# Altium PCB AutonomousVehicle_PowerBoard.PcbDoc
Units mil, origin at the board's own origin, x right, y up, seen from the top; angles counter-clockwise.
Board outline 2030 x 2125 mil, 2 copper layers (Top Layer, Bottom Layer); 39 components, 11 nets, 82 pads, 94 vias.
Unrouted connection lines stored in the file: 8.
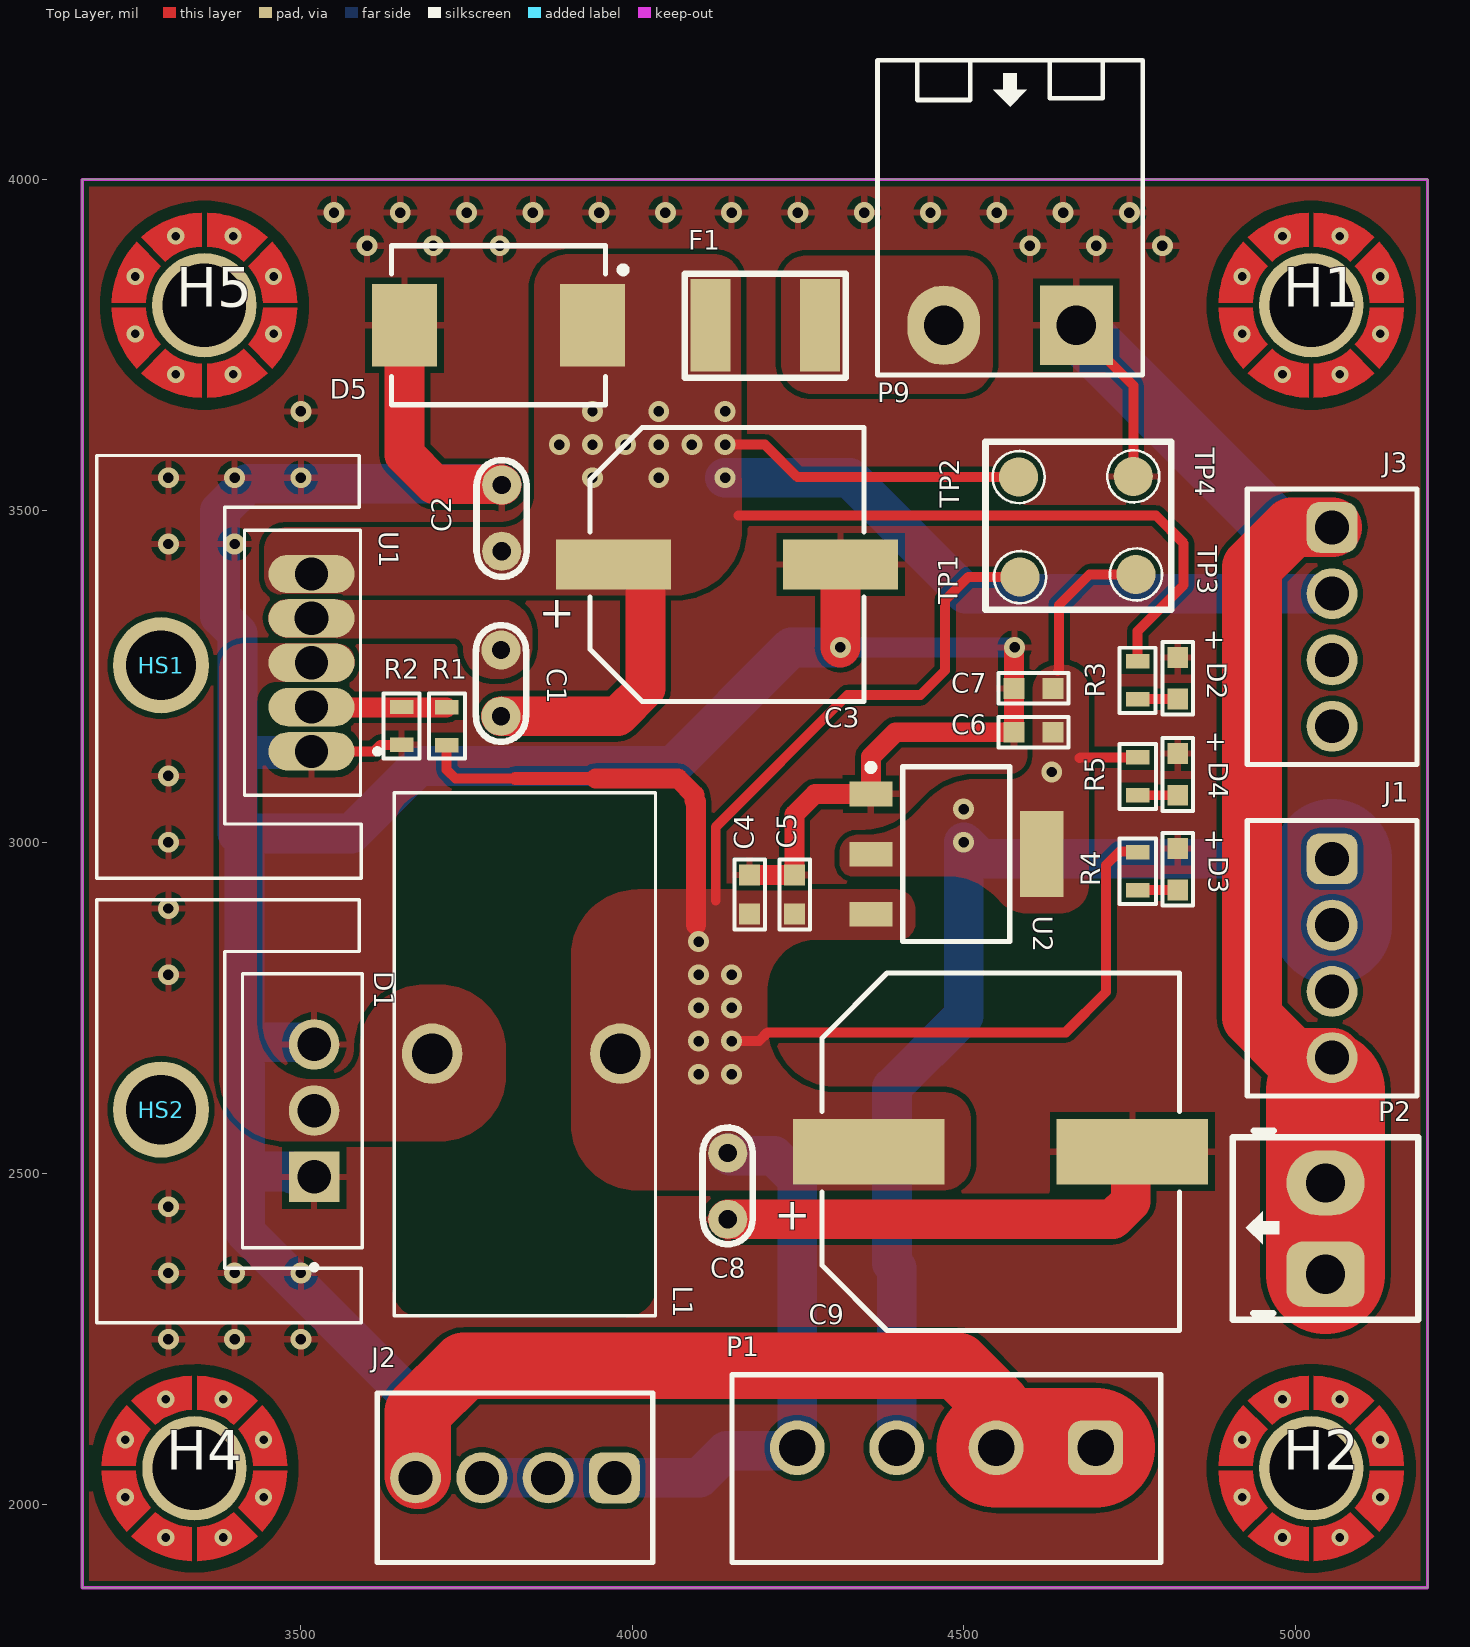
[diagram p0: Top Layer view]
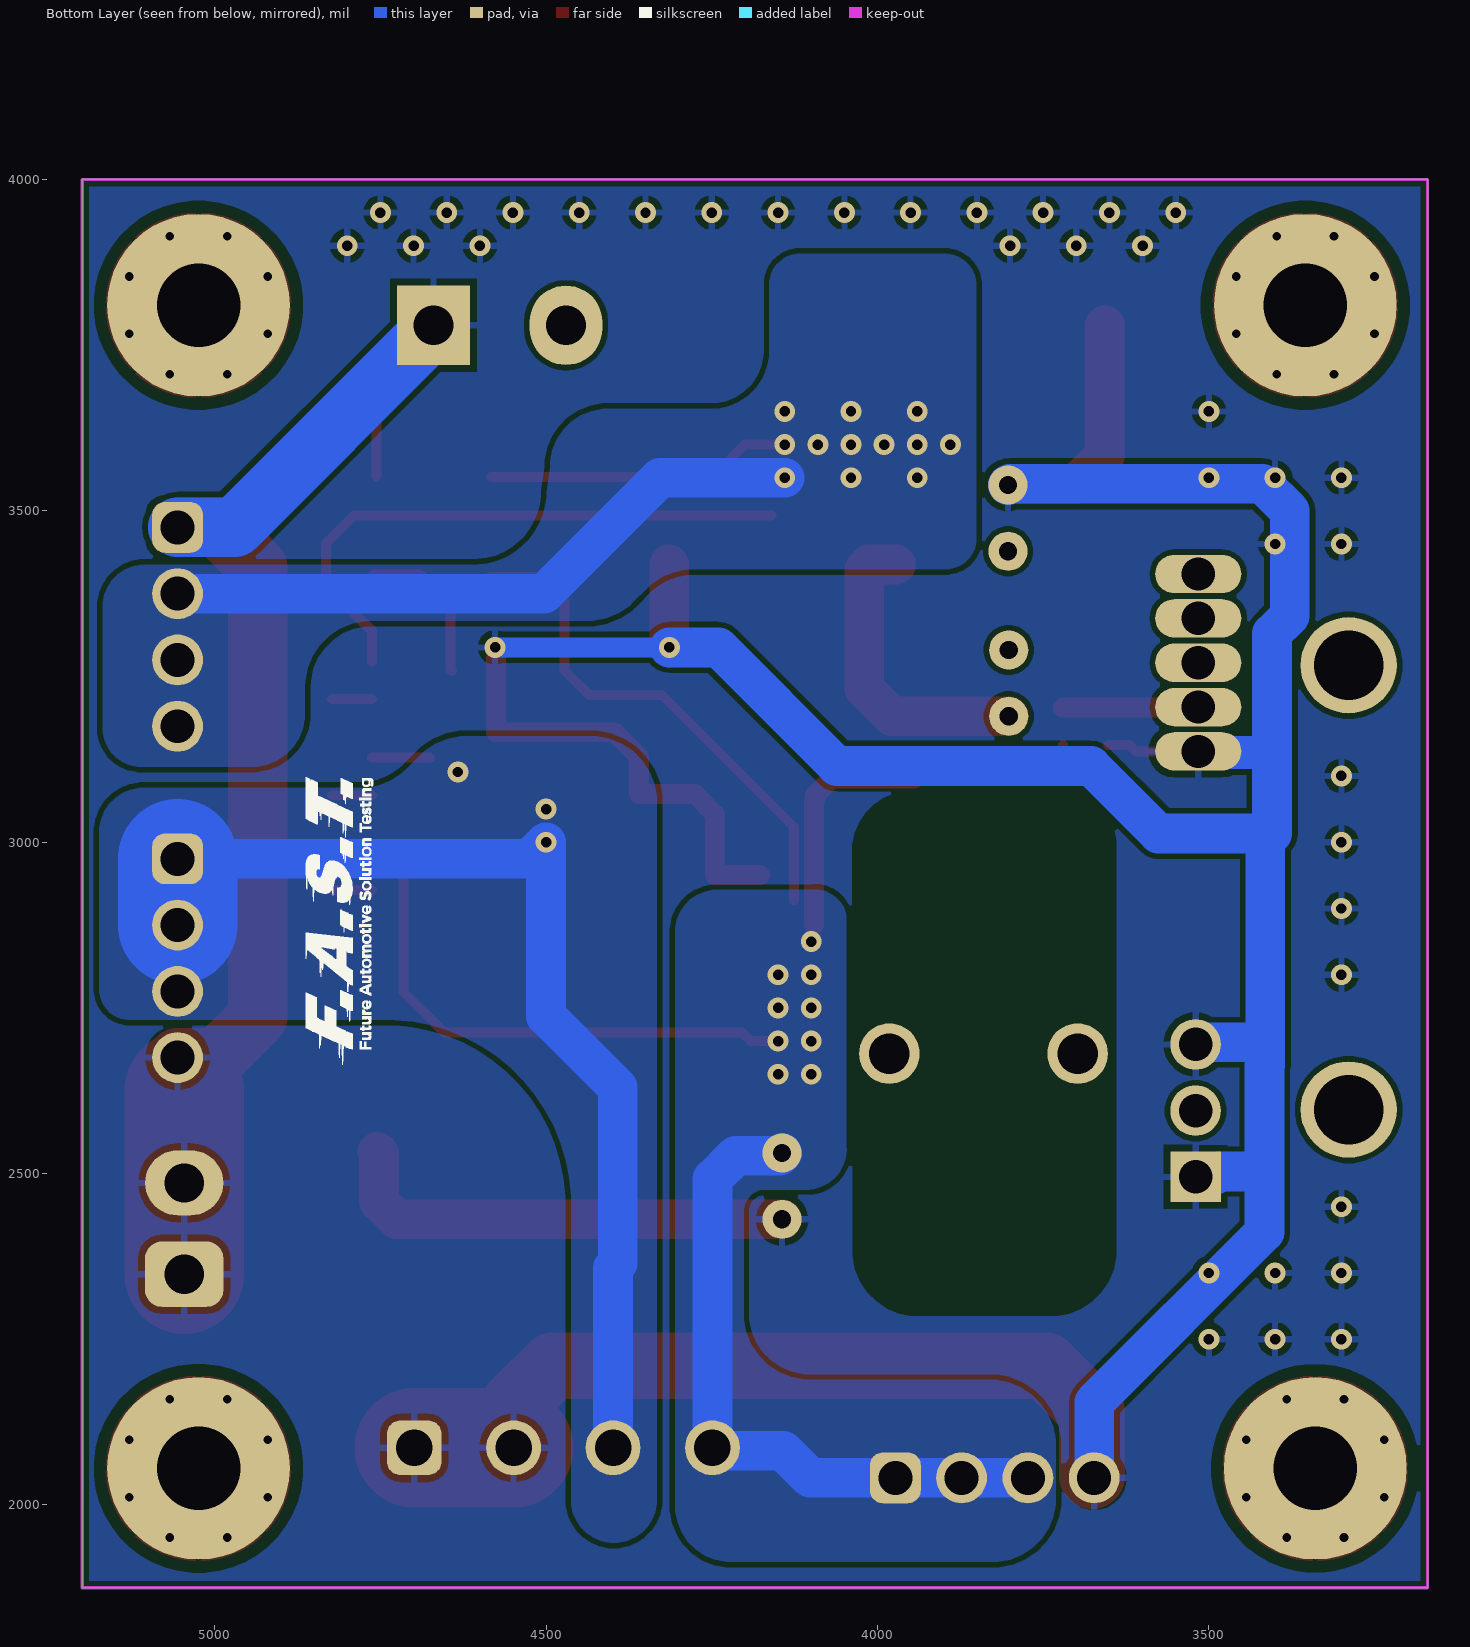
[diagram p1: Bottom Layer view, seen from below]

## Layer stack, top to bottom
Top Solder: solder mask 0.4, Solder Resist, Dk 3.5
Top Layer: signal copper 1.4
Dielectric 1: dielectric 12.6, FR-4, Dk 4.8
Bottom Layer: signal copper 1.4
Bottom Solder: solder mask 0.4, Solder Resist, Dk 3.5

## Board outline
3170,1875 3170,4000 5200,4000 5200,1875

## Design rules (kind name [scope] priority, off if disabled: settings)
Clearance [All] p1: gap=8 ignorepadtopadclearanceinfootprint=FALSE
ComponentClearance [All] p1: gap=5 collisioncheckmode=3 verticalgap=10 showdistances=FALSE
PlaneConnect [All] p1: planeconnectstyle=Direct reliefexpansion=20 reliefentries=4 reliefconductorwidth=10 reliefairgap=10
PolygonConnect PolygonConnect_4 [All vs IsNamedPolygon('GND')] p1: connectstyle=Relief reliefconductorwidth=10 reliefentries=4 polygonreliefangle="90 Angle" airgapwidth=10
PolygonConnect PolygonConnect_3 [All vs IsNamedPolygon('GND')] p2: connectstyle=Direct reliefconductorwidth=10 reliefentries=4 polygonreliefangle="90 Angle" airgapwidth=10
PolygonConnect PolygonConnect_2 [All vs IsNamedPolygon('GND')] p3: connectstyle=Relief reliefconductorwidth=10 reliefentries=4 polygonreliefangle="90 Angle" airgapwidth=10
PolygonConnect PolygonConnect_1 [All vs IsNamedPolygon('GND')] p4: connectstyle=Relief reliefconductorwidth=10 reliefentries=4 polygonreliefangle="90 Angle" airgapwidth=10
PolygonConnect [All] p5: connectstyle=Direct reliefconductorwidth=10 reliefentries=4 polygonreliefangle="90 Angle" airgapwidth=10
RoutingVias [All] p1: holewidth=15.75 width=31.5 viastyle="Through Hole" minholewidth=15.75 minwidth=31.5 maxholewidth=15.75 maxwidth=31.5
SolderMaskExpansion [All] p1: expansion=4 istentingtop=FALSE
Width [All] p1: maxlimit=180 minlimit=15 preferedwidth=60 minimp=50.000000 maximp=50.000000 favimp=50.000000
28 further rules are at their usual default settings.

## Components (designator, comment, footprint, x,y, rotation, side; value= is the part's Value field where it differs from the comment)
C1 "1 uF, 50VDC" CAP_RADIAL_2.54 3802,3191 r90 top
C2 "1 uF, 50VDC" CAP_RADIAL_2.54 3803,3440 r90 top
C3 "470uF, 25V" WCAP-ASLI_D10H10.5 4143,3419 r180 top
C4 "10 uF, 10 VDC" CAP_0603 4180,2922.98 r90 top
C5 "1 uF, 16 VDC" CAP_0603 4242,2918.98 r270 top
C6 "1 uF, 16 VDC" CAP_0603 4603.35,3169 r180 top
C7 "10 uF, 10 VDC" CAP_0603 4607.35,3229 r0 top
C8 "1 uF, 50VDC" CAP_RADIAL_2.54 4144,2530 r270 top
C9 "1000uF, 25V" WCAP-ASLI_D12.5H14 4555.82,2533 r180 top
D1 "Diode_Schottky" TO-220AB 3522.17,2595 r90 top
D2 "Blue, 3.2V" WL-SMCW_0603_H=0.7mm 4823,3247.39 r270 top
D3 "Blue, 3.2V" WL-SMCW_0603_H=0.7mm 4823,2959.22 r270 top
D4 "Blue, 3.2V" WL-SMCW_0603_H=0.7mm 4823,3102.41 r270 top
D5 "5A 40V" "DO-214AB, SMC" 3800.08,3805.24 r0 top
F1 "16V, 2.5A" Fuse_SMD_1812 4200,3780 r180 top
H1 "Hole" Hole_3.2mm 5025,3810 r0 top
H2 "Hole" Hole_3.2mm 5025,2055 r0 top
H4 "Hole" Hole_3.2mm 3340,2055 r0 top
H5 "Hole" Hole_3.2mm 3355,3810 r0 top
HS1 "HeatSink_1Hole" HEATSINK_TO220_SMALL 3342,3335.5 r270 top
HS2 "HeatSink_1Hole" HEATSINK_TO220_SMALL 3342,2665 r270 top
J1 "6A, 150V" 691210910004 5056,2825 r270 top
J2 "6A, 150V" 691210910004 3823,2041 r180 top
J3 "6A, 150V" 691210910004 5056,3325 r270 top
L1 "Toroidal Inductor" "Toroidal Inductor" 3966,2920.68 r0 top
P1 "10A, 300V" 691321300004 4474,2054.78 r180 top
P2 "HDR_Terminal" HDR_Terminal_3.5mm 5057.65,2401.87 r270 top
P9 "HDR_Terminal" KF-5.08-2-R 4670.11,3778.35 r180 top
R1 "10 KOhm, 1/4 W" resistor_0603 3720,3175 r270 top
R2 "3.3 KOhm, 1/4 W" resistor_0603 3652,3175.54 r90 top
R3 "10 KOhm, 1/4 W" resistor_0603 4762.44,3244.44 r90 top
R4 "10 KOhm, 1/4 W" resistor_0603 4763,2956.27 r90 top
R5 "10 KOhm, 1/4 W" resistor_0603 4763,3099.46 r90 top
TP1 "Test_Point" TP_1_5mm_SMD 4586,3398 r0 top
TP2 "Test_Point" TP_1_5mm_SMD 4584,3549 r0 top
TP3 "Test_Point" TP_1_5mm_SMD 4761,3402 r0 top
TP4 "Test_Point" TP_1_5mm_SMD 4757,3550 r0 top
U1 "XL4016" XL4016_TO-220-5 3521,3270.86 r90 top
U2 "AMS1117" AMS1117 4620.43,2986.37 r0 top

## Footprints (in the part's own frame and the unit in brackets; to place one, negate y for a bottom-side part, rotate by r counter-clockwise, add the part's x,y. Pads: shape width x height; smd on the part's side, far side on the other; paste and mask are expansions set on the pad)
691210910004 [mm] "2,54mm - modular - green - Horizontal wire entry - Cage clamp - 0,8mm2 wires - 04p"
  rrect50% 1.95x1.95 hole 1.3: 1(-3.81,0)
  round 1.95 hole 1.3: 2(-1.27,0) 3(1.27,0) 4(3.81,0)
  silkscreen extent -5.28,-3.25 5.28,3.25, body extent -5.28,-3.25 5.28,3.25, height 8.55
691321300004 [mm] "Vertical PCB Header, pitch 3.81mm, 04p"
  rrect50% 2.1x2.1 hole 1.4: 1(-5.715,-0.8)
  round 2.1 hole 1.4: 2(-1.905,-0.8) 3(1.905,-0.8) 4(5.715,-0.8)
  silkscreen extent -8.21,-3.6 8.22,3.6, body extent -8.21,-3.6 8.21,3.6, height 9.25
AMS1117 [mm]
  rect 1.65x0.95 smd: 1(-6.615,2.189) 2(-6.615,-0.111) 3(-6.615,-2.411)
  rect 1.65x3.3 smd: 4(-0.065,-0.111)
  silkscreen extent -6.74,-3.46 -1.29,3.34, body extent -6.84,-3.36 0.16,3.14, height 1.64
CAP_0603 [mm]
  rect 0.8x0.8 smd: 1(-0.801,0.076) 2(0.699,0.076)
  silkscreen extent -1.4,-0.51 1.3,0.66, body extent -0.85,-0.32 0.75,0.48, height 0.8
CAP_RADIAL_2.54 [mm]
  round 1.5 hole 0.7: 1(-0.025,0) 2(2.515,0)
  silkscreen extent -1,-0.97 3.47,0.97, body extent -1.67,-0.85 4.17,0.85, height 6.12
"DO-214AB, SMC" [mm]
  rect 2.5x3.15 smd: 1(-3.646,-0.641) 2(3.554,-0.641)
  silkscreen extent -4.15,-3.69 4.85,2.41, body extent -4.02,-3.62 3.93,2.28, height 2.27
Fuse_SMD_1812 [mil] "Fuse SMD, size 1812"
  rect 60x140 smd: 0(-83.41,0) 1(82,0)
  silkscreen extent -122,-78 121,79, body extent -93,-67 93,67, height 18
HDR_Terminal_3.5mm [mm]
  rrect50% 2.5x3 hole 1.5: 1(1.363,-0.296)
  oval 2.5x3 hole 1.5: 2(-2.137,-0.296)
  silkscreen extent -4.14,-3.85 3.11,3.26, body extent -3.94,-3.94 3.17,3.35, height 8.51
HEATSINK_TO220_SMALL [mil]
  round 145.12 hole 105.12: 1(68.5,-53)
  silkscreen extent -248,-150 390,249
Hole_3.2mm [mm]
  round 4 / inner round 7 / far side round 7 hole 3.2: 1(-0.014,0.006)
  Top Layer pour cut-out: -4.014,0.006 -3.71,1.537 -2.842,2.834 -1.545,3.701 -0.014,4.006 -0.014,4.006 1.517,3.701 2.814,2.834 3.681,1.537 3.986,0.006 3.986,0.006 3.682,-1.525 2.814,-2.822 1.517,-3.69 -0.014,-3.994 -0.014,-3.994 -1.545,-3.69 -2.842,-2.822 -3.71,-1.525 -4.014,0.006
  Top Layer region: -2.264,0.106 -2.239,0.331 -2.189,0.581 -2.114,0.806 -2.039,0.981 -1.964,1.131 -1.889,1.256 -1.789,1.381 -1.689,1.506 -2.614,2.431 -2.789,2.231 -2.939,2.031 -3.064,1.831 -3.189,1.606 -3.289,1.381 -3.364,1.181 -3.439,0.956 -3.489,0.731 -3.514,0.606 -3.539,0.456 -3.564,0.106
  Top Layer region: -2.264,-0.094 -2.239,-0.319 -2.189,-0.569 -2.114,-0.794 -2.039,-0.969 -1.964,-1.119 -1.889,-1.244 -1.789,-1.369 -1.689,-1.494 -2.614,-2.419 -2.789,-2.219 -2.939,-2.019 -3.064,-1.819 -3.189,-1.594 -3.289,-1.369 -3.364,-1.169 -3.439,-0.944 -3.489,-0.719 -3.514,-0.594 -3.539,-0.444 -3.564,-0.094
  Top Layer region: -0.114,2.256 -0.339,2.231 -0.589,2.181 -0.814,2.106 -0.989,2.031 -1.139,1.956 -1.264,1.881 -1.389,1.781 -1.514,1.681 -2.439,2.606 -2.239,2.781 -2.039,2.931 -1.839,3.056 -1.614,3.181 -1.389,3.281 -1.189,3.356 -0.964,3.431 -0.739,3.481 -0.614,3.506 -0.464,3.531 -0.114,3.556
  Top Layer region: 0.086,2.256 0.311,2.231 0.561,2.181 0.786,2.106 0.961,2.031 1.111,1.956 1.236,1.881 1.361,1.781 1.486,1.681 2.411,2.606 2.211,2.781 2.011,2.931 1.811,3.056 1.586,3.181 1.361,3.281 1.161,3.356 0.936,3.431 0.711,3.481 0.586,3.506 0.436,3.531 0.086,3.556
  Top Layer region: 2.236,-0.094 2.211,-0.319 2.161,-0.569 2.086,-0.794 2.011,-0.969 1.936,-1.119 1.861,-1.244 1.761,-1.369 1.661,-1.494 2.586,-2.419 2.761,-2.219 2.911,-2.019 3.036,-1.819 3.161,-1.594 3.261,-1.369 3.336,-1.169 3.411,-0.944 3.461,-0.719 3.486,-0.594 3.511,-0.444 3.536,-0.094
  Top Layer region: 2.236,0.106 2.211,0.331 2.161,0.581 2.086,0.806 2.011,0.981 1.936,1.131 1.861,1.256 1.761,1.381 1.661,1.506 2.586,2.431 2.761,2.231 2.911,2.031 3.036,1.831 3.161,1.606 3.261,1.381 3.336,1.181 3.411,0.956 3.461,0.731 3.486,0.606 3.511,0.456 3.536,0.106
  Top Layer region: 0.086,-2.244 0.311,-2.219 0.561,-2.169 0.786,-2.094 0.961,-2.019 1.111,-1.944 1.236,-1.869 1.361,-1.769 1.486,-1.669 2.411,-2.594 2.211,-2.769 2.011,-2.919 1.811,-3.044 1.586,-3.169 1.361,-3.269 1.161,-3.344 0.936,-3.419 0.711,-3.469 0.586,-3.494 0.436,-3.519 0.086,-3.544
  Top Layer region: -0.114,-2.244 -0.339,-2.219 -0.589,-2.169 -0.814,-2.094 -0.989,-2.019 -1.139,-1.944 -1.264,-1.869 -1.389,-1.769 -1.514,-1.669 -2.439,-2.594 -2.239,-2.769 -2.039,-2.919 -1.839,-3.044 -1.614,-3.169 -1.389,-3.269 -1.189,-3.344 -0.964,-3.419 -0.739,-3.469 -0.614,-3.494 -0.464,-3.519 -0.114,-3.544
  Bottom Layer pour cut-out: -4.014,0.006 -3.71,1.537 -2.842,2.834 -1.545,3.701 -0.014,4.006 -0.014,4.006 1.517,3.701 2.814,2.834 3.681,1.537 3.986,0.006 3.986,0.006 3.682,-1.525 2.814,-2.822 1.517,-3.69 -0.014,-3.994 -0.014,-3.994 -1.545,-3.69 -2.842,-2.822 -3.71,-1.525 -4.014,0.006
KF-5.08-2-R [mil]
  rect 110x120 hole 60: 1(0.11,-1.65)
  oval 110x120 hole 60: 2(200.11,-1.65)
  silkscreen extent -100,-402 300,73, body extent -90,-404 302,68, height 334
resistor_0603 [mm]
  rect 0.55x0.9 smd: 1(-0.725,0) 2(0.725,0)
  silkscreen extent -1.25,-0.69 1.24,0.7, body extent -0.8,-0.45 0.8,0.45, height 0.5
TO-220AB [mm]
  rect 1.94x1.94 hole 1.29: 1(-2.54,0.055)
  round 1.94 hole 1.29: 2(0,0.055) 3(2.54,0.055)
  silkscreen extent -6.1,-1.79 5.25,2.8, body extent -5.25,-1.79 5.25,2.8, height 20.2
"Toroidal Inductor" [mm]
  round 2.325 hole 1.55: 1(-6.807,-6.088) 2(0.406,-6.088)
  silkscreen extent -8.25,-16.13 1.75,3.91
TP_1_5mm_SMD [mil]
  round 59.06 smd: 1(-1,2)
  silkscreen extent -40,-37 38,41
WCAP-ASLI_D10H10.5 [mm] "Aluminium Electrolytic V-Chip SMT Capacitors, 10x10.5mm"
  rect 4.4x1.9 smd: 1(4.35,0) 2(-4.35,0)
  silkscreen extent -5.25,-5.25 5.25,5.25, body extent -5.5,-5.15 5.5,5.15, height 10.5
WCAP-ASLI_D12.5H14 [mm] "Aluminium Electrolytic V-Chip SMT Capacitors, 12.5x14mm"
  rect 5.8x2.5 smd: 1(5.05,0) 2(-5.05,0)
  silkscreen extent -6.85,-6.85 6.85,6.85, body extent -7.1,-6.72 7.1,6.73, height 14
WL-SMCW_0603_H=0.7mm [mm] "SMD Mono-color Chip LED, body 1.6x0.8mm"
  rect 0.8x0.8 smd: 1(-0.8,0) 2(0.8,0)
  silkscreen extent -1.4,-0.58 1.4,0.58, body extent -0.8,-0.4 0.8,0.4, height 0.7
XL4016_TO-220-5 [mil]
  oval 58x130 hole 50: 1(-133.86,5) 2(-66.93,5) 3(0,5) 5(133.86,5)
  oval 58x130 hole 50.79: 4(66.93,5)
  silkscreen extent -200,-98 200,106, body extent -200,-60 200,105, height 650

## Part data
C1 C2 C8: library part Capacitor, "Capacitor"
C3: library part 865080457015, "V-Chip, D10 x H10.5mm, 470uF, 25V", Capacitance=470uF, Capacitance Tolerance=+/-20%, Leakage Current=117.5uA, Manufacturer="Wurth Elektronik", Manufacturer Part Number=N/A, Operating Temperature Max=105°C, Operating Temperature Min=-55°C, Rated Voltage (DC)=25V, Ripple Current=650mA, Category="Aluminum Electrolytic Capacitors", ComponentLink2Description="Datasheet Link", ComponentLink2URL=https://www.we-online.com/redexpert/spec/865080457015?ad, Diameter=10mm, Dissipation Factor=14%, Endurance=2000h, Height=10.5mm, Mount="Surface Mount", Packaging="Tape and Reel", Supplier 1 Name=Mouser, Supplier 1 SN=710-865080457015, Supplier 1 URL=https://www.mouser.com/ProductDetail/Wurth-Elektronik/865080457015?qs=0KOYDY2FL2%252BEKTJa1jxjAQ%3D%3D, Supplier 2 Name=Digi-Key, Supplier 2 SN=N/A, Supplier 2 URL=N/A, Supplier 3 Name=thegioiic, Supplier 3 SN=N/A, Supplier 3 URL=https://www.thegioiic.com/tu-nhom-smd-470uf-25v-10x10-5mm
C4 C7: library part 0106031061010, "CAP, size 0603, 10 uF, 10 VDC", Capacitance="10 uF", Manufacture Name="Samsung Electro-Mechanics", Manufacture SN=CL10A106KP8NNWC, Operating Temperature="-55 to +125degC", Tolerance=+/-10%, Voltage Rating DC="10 VDC", ComponentLink2Description=Datasheet, ComponentLink2URL=https://www.mouser.vn/datasheet/2/585/MLCC-1837944.pdf, Mounting Technology=SMT, Packaging="Tape and Reel", Size=0603, Supplier 1 Name=Mouser, Supplier 1 SN=187-CL10A106KP8NNWC, Supplier 1 URL=https://www.mouser.vn/ProductDetail/Samsung-Electro-Mechanics/CL10A106KP8NNWC?qs=xZ%2FP%252Ba9zWqZx8LSX23YqWA%3D%3D&utm_source=mouser-refine-download&utm_medium=file&utm_campaign=CL10A106KP8NNWC&utm_content=Samsung-Electro-Mechanics, Supplier 2 Name=Digi-Key, Supplier 2 SN=1276-CL10A106KP8NNWCTR-ND, Supplier 2 URL=https://www.digikey.com/en/products/detail/samsung-electro-mechanics/cl10a106kp8nnwc/16572907, Supplier 3 Name=thegioiic, Supplier 3 SN=N/A, Supplier 3 URL=https://www.thegioiic.com/tu-gom-0603-10uf-25v
C5 C6: library part 0106031051016, "CAP, size 0603, 1 uF, 16 VDC", Capacitance="1 uF", Manufacture Name="Samsung Electro-Mechanics", Manufacture SN=CL10B105KO8NNWC, Operating Temperature="-55 to +125degC", Tolerance=+/-10%, Voltage Rating DC="16 VDC", ComponentLink2Description=Datasheet, ComponentLink2URL=https://www.mouser.vn/datasheet/2/585/Samsung_MLCC_1837944-1929650.pdf, Mounting Technology=SMT, Packaging="Tape and Reel", Size=0603, Supplier 1 Name=Mouser, Supplier 1 SN=187-CL10B105KO8NNWC, Supplier 1 URL=https://www.mouser.vn/ProductDetail/Samsung-Electro-Mechanics/CL10B105KO8NNWC?qs=81r%252BiQLm7BT%252BXtc72qn1ug%3D%3D&utm_source=mouser-refine-download&utm_medium=file&utm_campaign=CL10B105KO8NNWC&utm_content=Samsung-Electro-Mechanics, Supplier 2 Name=Digi-Key, Supplier 2 SN=1276-CL10B105KO8NNWCTR-ND, Supplier 2 URL=https://www.digikey.com/en/products/detail/samsung-electro-mechanics/cl10b105ko8nnwc/16572783, Supplier 3 Name=thegioiic, Supplier 3 SN=N/A, Supplier 3 URL=https://www.thegioiic.com/tu-gom-0603-1uf-16v
C9: library part 865080462016, "V-Chip, D12.5 x H14mm, 1000uF, 25V", Capacitance=1000uF, Capacitance Tolerance=+/-20%, Leakage Current=250uA, Manufacturer="Wurth Elektronik", Manufacturer Part Number=N/A, Operating Temperature Max=105°C, Operating Temperature Min=-55°C, Rated Voltage (DC)=25V, Ripple Current=1100mA, Category="Aluminum Electrolytic Capacitors", ComponentLink2Description="Datasheet Link", ComponentLink2URL=https://www.we-online.com/redexpert/spec/865080462016?ad, Diameter=12.5mm, Dissipation Factor=14%, Endurance=5000h, Height=14mm, Mount="Surface Mount", Packaging="Tape and Reel", Supplier 1 Name=Mouser, Supplier 1 SN=710-865080462016, Supplier 1 URL=https://www.mouser.com/ProductDetail/Wurth-Elektronik/865080462016?qs=0KOYDY2FL2%252BphFKARPaJJA%3D%3D, Supplier 2 Name=Digi-Key, Supplier 2 SN=N/A, Supplier 2 URL=N/A, Supplier 3 Name=thegioiic, Supplier 3 SN=N/A, Supplier 3 URL=https://www.thegioiic.com/tu-nhom-smd-1000uf-25v-12-5x13-5mm
D1: library part Dual_Diode_Schottky, "MBR20100CT Diode Schottky 100V 10A TO-220"
D2 D3 D4: library part 160603BlueClear, "WL-SMCW SMT Mono-color Chip LED Waterclear, size 0603, Blue, 3.2V, 140deg", Color=Blue, ComponentLink1Description="Datasheet link", ComponentLink1URL=N/A, ComponentLink2Description="Supplier 1 URL", ComponentLink2URL=https://www.mouser.vn/ProductDetail/Wurth-Elektronik/150060BS75003?qs=Li%252BoUPsLEnu8LvIbM48DKA%3D%3D, ComponentLink3Description="Supplier 2 URL", ComponentLink3URL=https://www.digikey.com/en/products/detail/liteon/LTST-C191TBKT/388530, ComponentLink4Description="Supplier 3 URL", ComponentLink4URL=https://www.thegioiic.com/led-xanh-duong-0603-dan-smd-trong-suot, Size=0603, Supplier 1 Name=Mouser, Supplier 1 SN=710-150060GS75000, Supplier 1 URL=https://www.mouser.vn/ProductDetail/Wurth-Elektronik/150060BS75003?qs=Li%252BoUPsLEnu8LvIbM48DKA%3D%3D, Supplier 2 Name=Digi-Key, Supplier 2 SN=160-1647-2-ND, Supplier 2 URL=https://www.digikey.com/en/products/detail/liteon/LTST-C191TBKT/388530, Supplier 3 Name=ICDayRoi, Supplier 3 SN=N/A, Supplier 3 URL=https://www.thegioiic.com/led-xanh-duong-0603-dan-smd-trong-suot, Type=Clear
D5: library part Diode_Schottky, "SS54 SMC Diode Schottky 5A 40V"
F1: library part 061812250016, "Resettable Fuse, Size 1812, 16V, 2.5A", Hold Current=2.5A, Manufacturer=Bourns, Threshold Current=100A, Threshold Voltage=16V, Trip Current=5A, ComponentLink1Description="Datasheet link", ComponentLink1URL=https://www.bourns.com/docs/Product-Datasheets/mfnsmf.pdf, ComponentLink2Description="Supplier 1 URL", ComponentLink2URL=https://www.mouser.vn/ProductDetail/Bourns/MF-MSMF250-16X-2?qs=9fn1gpisni78zr7pGyDhCQ%3D%3D, ComponentLink3Description="Supplier 2 URL", ComponentLink3URL=https://www.digikey.com/en/products/detail/bourns-inc/MF-MSMF250-16X-2/2563289, ComponentLink4Description="Supplier 3 URL", ComponentLink4URL=https://www.thegioiic.com/mf-msmf250-16-cau-chi-tu-phuc-hoi-1812-16v-2-5a, Mounting Technology=SMT/SMD, Size=1812, Supplier 1 Name=Mouser, Supplier 1 SN=652-MF-MSMF250/16X-2, Supplier 1 URL=https://www.mouser.vn/ProductDetail/Bourns/MF-MSMF250-16X-2?qs=9fn1gpisni78zr7pGyDhCQ%3D%3D, Supplier 2 Name=Digi-Key, Supplier 2 SN=MF-MSMF250/16X-2TR-ND, Supplier 2 URL=https://www.mouser.vn/ProductDetail/Bourns/MF-MSMF250-16X-2?qs=9fn1gpisni78zr7pGyDhCQ%3D%3D, Supplier 3 Name=thegioiic, Supplier 3 SN=MF-MSMF250/16, Supplier 3 URL=https://www.thegioiic.com/mf-msmf250-16-cau-chi-tu-phuc-hoi-1812-16v-2-5a
J1 J2 J3: library part 691210910004, "WR-TBL Series 2109 Horizontal Entry, THT, pitch 2.54mm, 4p", Manufacturer="Wurth Elektronik", Operating Temperature Max=105°C, Operating Temperature Min=-40°C, Rated Current=6A, Working Voltage=150V, Application="Rising Cage Clamp", Category="Terminal Blocks", ComponentLink1Description="Datasheet Link", ComponentLink1URL=https://www.we-online.com/redexpert/spec/691210910004?ad, ComponentLink2Description="Supplier 1 URL", ComponentLink2URL=N/A, ComponentLink3Description="Supplier 2 URL", ComponentLink3URL=N/A, ComponentLink4Description="Supplier 3 URL", ComponentLink4URL=https://www.thegioiic.com/kf120-4-v-domino-4-chan-thang-2-54mm-150v-6a-han-pcb, Manufacturer Part Number=691210910004, Match Code=WR-TBL, Modularity=No, Mount="Through Hole", Number of Pins=4, Number of Rows=1, Orientation=Horizontal, Packaging=Box, Pitch=2.54mm, Supplier 1 Name=Mouser, Supplier 1 SN=N/A, Supplier 1 URL=N/A, Supplier 2 Name=Digi-Key, Supplier 2 SN=N/A, Supplier 2 URL=N/A, Supplier 3 Name=thegioiic, Supplier 3 SN=N/A, Supplier 3 URL=https://www.thegioiic.com/kf120-4-v-domino-4-chan-thang-2-54mm-150v-6a-han-pcb
L1: "Dipole Toroidal Inductor, 47uH, 8A"
P1: library part 691321300004, "WR-TBL Series 321 Vertical PCB Header, THT, pitch 3.81mm, 4p", Manufacturer="Wurth Elektronik", Operating Temperature Max=105°C, Operating Temperature Min=-40°C, Rated Current=10A, Working Voltage=300V, Application=Pluggable, Category="Terminal Blocks", ComponentLink1Description="Datasheet Link", ComponentLink1URL=https://www.we-online.com/redexpert/spec/691321300004?ad, ComponentLink2Description="Supplier 1 URL", ComponentLink2URL=N/A, ComponentLink3Description="Supplier 2 URL", ComponentLink3URL=N/A, ComponentLink4Description="Supplier 3 URL", ComponentLink4URL=https://www.thegioiic.com/kf-3-81-4-v-terminal-block-plug-in-han-pcb-4-chan-thang-3-81mm-300v-10a, Manufacturer Part Number=691321300004, Match Code=WR-TBL, Modularity=No, Mount="Through Hole", Number of Pins=4, Number of Rows=1, Orientation=Vertical, Packaging=Box, Pitch=3.81mm, Supplier 1 Name=Mouser, Supplier 1 SN=N/A, Supplier 1 URL=N/A, Supplier 2 Name=Digi-Key, Supplier 2 SN=N/A, Supplier 2 URL=N/A, Supplier 3 Name=thegioiic, Supplier 3 SN=N/A, Supplier 3 URL=https://www.thegioiic.com/kf-3-81-4-v-terminal-block-plug-in-han-pcb-4-chan-thang-3-81mm-300v-10a
P2 P9: "HDR_Terminal 2 pin", ComponentLink1Description=URL, ComponentLink1URL=https://www.thegioiic.com/kf128-2-v-domino-2-chan-thang-3-5mm-300v-10a-han-pcb, SUPPLIER=ThegioiIC
R1 R3 R4 R5: library part 0006031031, "RES, size 0603, 10 KOhm, 1/4 W", Manufacture  Name=OEM, Rated Power="1/4 W", Resistance="10 KOhm", Resistance tolerance=+/-1%, ComponentLink1Description="Datasheet link", ComponentLink1URL=https://fscdn.rohm.com/en/products/databook/datasheet/passive/resistor/chip_resistor/esr-e.pdf, ComponentLink2Description="Supplier 1 URL", ComponentLink3Description="Supplier 2 URL", ComponentLink3URL=https://www.digikey.com/en/products/detail/rohm-semiconductor/ESR03EZPF1002/1983429, ComponentLink4Description="Supplier 3 URL", ComponentLink4URL=N/A, Manufacture  SN=OEM, Mounting Technology=SMT, Size=0603, Supplier 1 Name=Mouser, Supplier 1 SN=755-ESR03EZPF1002, Supplier 1 URL=https://www.mouser.vn/ProductDetail/ROHM-Semiconductor/ESR03EZPF1002?qs=sGAEpiMZZMvdGkrng054t67Efho1F8r6CDeAsqwFse8%3D, Supplier 2 Name=Digi-Key, Supplier 2 SN="RHM10KADTR-ND RHM10KADCT-ND RHM10KADDKR-ND", Supplier 2 URL=https://www.digikey.com/en/products/detail/rohm-semiconductor/ESR03EZPF1002/1983429, Supplier 3 Name=thegioiic, Supplier 3 SN=N/A, Supplier 3 URL=N/A
  R1: ComponentLink2URL=N/A
  R3 R4 R5: ComponentLink2URL=https://www.thegioiic.com/dien-tro-10-kohm-0603-1-
R2: library part 0006033321, "RES, size 0603, 3.3 KOhm, 1/4 W", Manufacture  Name=OEM, Rated Power="1/4 W", Resistance="3.3 KOhm", Resistance tolerance=+/-1%, ComponentLink1Description="Datasheet link", ComponentLink1URL=https://api.pim.na.industrial.panasonic.com/file_stream/main/fileversion/4484, ComponentLink2Description="Supplier 1 URL", ComponentLink2URL=N/A, ComponentLink3Description="Supplier 2 URL", ComponentLink3URL=https://www.digikey.com/en/products/detail/panasonic-electronic-components/ERJ-UP3F3301V/12093093, ComponentLink4Description="Supplier 3 URL", ComponentLink4URL=N/A, Manufacture  SN=OEM, Mounting Technology=SMT, Size=0603, Supplier 1 Name=Mouser, Supplier 1 SN=667-ERJ-PA3F3301V, Supplier 1 URL=https://www.mouser.vn/ProductDetail/Panasonic/ERJ-PA3F3301V?qs=sGAEpiMZZMvdGkrng054t6%2FAfIpq60YDpB2wwO%252BBqIBQy72ynM%2FI9Q%3D%3D, Supplier 2 Name=Digi-Key, Supplier 2 SN="10-ERJ-UP3F3301VTR-ND 10-ERJ-UP3F3301VCT-ND 10-ERJ-UP3F3301VDKR-ND", Supplier 2 URL=https://www.digikey.com/en/products/detail/panasonic-electronic-components/ERJ-UP3F3301V/12093093, Supplier 3 Name=thegioiic, Supplier 3 SN=N/A, Supplier 3 URL=N/A
U1: "IC Switching Buck 8A TO-220-5"
U2: "IC Linear Drop Out 3.3V 1A SOT-223"

## Via types
v1: diameter 31.5, hole 15.75, Top Layer to Bottom Layer, 62 vias
v2: diameter 25.98, hole 12.99, Top Layer to Bottom Layer, 32 vias

## Nets (pads, with @x,y where several pads share a name; then routed paths per layer and width w, separated by ;. In a path a pad name is that pad's centre, name@x,y a point inside that pad or via, vN(x,y) a via of type N, cw(c..) or ccw(c..) an arc to the next point about the centre after c; other vN are vias at no path point)
+3.3: C6.1 C7.2 J1.1 J1.2 J1.3 P1.3 R5.2 TP3.1 U2.2 U2.4 | length 1952
  Top Layer w15: 4642,3258 4644,3260 4644,3358 4690,3404 TP3.1 ; 4675,3127 4676,3128 R5.2
  Bottom Layer w60: P1.3 4399,2357.71 4392,2364.71 4392,2630 4500,2738 v1(4500,3000) 4525,2975 J1.1
  Bottom Layer w180: J1.2 J1.1
  other v1: 4500,3050 4633,3106
+5: C4.1 C5.2 C8.1 C9.1 J2.1 J2.2 J2.3 L1.2 P1.4 R1.2 R4.2 TP1.1 U2.3 | length 3277.9
  Top Layer w15: R1.2 3720,3109.12 3733.12,3096 3823,3096 ; 4094,3063 4096,3061 ; 4126,2912 4126,3023 4325,3222 4435,3222 4472,3259 4472,3365 4507,3400 TP1.1 ; v1(4150,2700) 4191.28,2700 4204.48,2713.2 4654.2,2713.2 4715,2774 4715,2965.82 4734.93,2985.75 4762.06,2985.75 R4.2
  Top Layer w20: 3823,3096 3945,3096
  Top Layer w30: 3945,3096 4069,3096 4094,3071 4094,3063 ; 4096,2875 4096,3061
  Bottom Layer w60: J2.3 J2.2 J2.1 4101.39,2041 4142.32,2081.94 4244.66,2081.94 P1.4 4249,2491.85 4213.85,2527 4148,2527 C8.1
  other v1: 4100,2650 4150,2650 4100,2700 4100,2750 4150,2750 4100,2800 4150,2800 4100,2850
+12: C1.1 C2.1 C3.1 D5.2 F1.1 J3.2 J3.3 J3.4 R3.2 TP2.1 U1.5 | length 2814.3
  Top Layer w15: v1(4140,3600) 4200,3600 4249,3551 TP2.1 ; 4160,3493 4790,3493 4832,3451 4832,3388 4762.44,3318.44 R3.2
  Top Layer w60: C1.1 3978,3190 4020,3232 4020,3411.6 4012.6,3419 C3.1
  Bottom Layer w60: v1(4140,3550) 4328,3550 4503,3375 J3.2
  other v1: 3940,3550 4040,3550 3890,3600 3940,3600 3990,3600 4040,3600 4090,3600 3940,3650 4040,3650 4140,3650
GND: C2.2 C3.2 C4.2 C5.1 C6.2 C7.1 C8.2 C9.2 D1.1 D1.3 D2.1 D3.1 D4.1 D5.1 J1.4 J2.4 J3.1 P1.1 P1.2 P2.1 P2.2 P9.1 R2.1 TP4.1 U1.1 U2.1 | length 8918.9
  Top Layer w15: U1.1 3610,3137 3620,3147 R2.1 ; P9.1 4670,3775 4756,3689 TP4.1
  Top Layer w30: C4.2 C5.1 4245,3042 4275.55,3072.55 U2.1 4360,3129 4397,3166 C6.2 ; C6.2@4575.82,3176.28 C7.1 4575.82,3292.41 4577,3293.6 v1(4577,3294)
  Top Layer w60: D5.1 3656.54,3584.46 3701,3540 3802,3540 C2.2 ; J2.4 J2.4@3676.21,2044.21 ; C8.2 4725,2431 4752,2458 4752,2530.36 C9.2 ; v1(4314,3294) 4314.26,3294.26 C3.2
  Top Layer w90: J1.4 4996,2675 4935,2736 4935,3415 4995,3475 J3.1
  Top Layer w100: J2.4@3676.21,2044.21 3676.21,2140.21 3746,2210 4490.42,2210 4549,2151.42 P1.2
  Top Layer w180: P1.2 P1.1 ; P2.1 P2.2 5046,2625
  Bottom Layer w30: v1(4314,3294) v1(4577,3294)
  Bottom Layer w50: 3404.56,3130 3410.03,3135.47 3514.47,3135.47 U1.1
  Bottom Layer w60: 3415,2662.99 3415,2698.13 ; 3416,2662.99 3416,2503.19 ; D1.1 3516.81,2498.19 3489.93,2498.19 3484.93,2503.19 3416,2503.19 ; D1.3 3516.87,2698.13 3415,2698.13 ; J2.4 3673,2155 3416,2412 3416,2503.19 ; C2.2 3801,3541 3419.01,3541 3378,3499.99 3378,3341.43 3404.56,3314.87 3404.56,3130 3404.56,3013 3415,3013 ; v1(4314,3294) 4240,3294 4061,3115 3678,3115 3576,3013 3415,3013 ; 3415,2698.13 3415,3013
  Bottom Layer w90: P9.1 4670,3775 4970,3475 J3.1
  other v1: 3300,2250 3400,2250 3500,2250 3300,2350 3400,2350 3500,2350 3300,2450 3300,2800 3300,2900 3300,3000 3300,3100 3300,3450 3400,3450 3300,3550 3400,3550 3500,3550 3500,3650 3600,3900 3700,3900 3800,3900 4600,3900 4700,3900 4800,3900 3550,3950 3650,3950 3750,3950 3850,3950 3950,3950 4050,3950 4150,3950 4250,3950 4350,3950 4450,3950 4550,3950 4650,3950 4750,3950
NetC1_2: C1.2 U1.4
NetD1_2: D1.2 L1.1 U1.3
NetD2_2: D2.2 R3.1 | length 60.6
  Top Layer w15: R3.1 D2.2
NetD3_2: D3.2 R4.1 | length 60
  Top Layer w15: R4.1 D3.2
NetD4_2: D4.2 R5.1 | length 60
  Top Layer w15: R5.1 D4.2
NetF1_0: F1.0 P9.2
NetR1_1: R1.1 R2.2 U1.2 | length 204.4
  Top Layer w30: U1.2 3516,3203.54 R1.1
pads on no net: H1.1 H2.1 H4.1 H5.1 HS1.1 HS2.1
copper on no net:
  other v2: 3296.14,1950.91 3382.76,1950.91 4981.14,1950.91 5067.76,1950.91 3235.12,2011.93 3443.78,2011.93 4920.12,2011.93 5128.78,2011.93 3235.12,2098.54 3443.78,2098.54 4920.12,2098.54 5128.78,2098.54 3296.14,2159.57 3382.76,2159.57 4981.14,2159.57 5067.76,2159.57 3311.14,3705.91 3397.76,3705.91 4981.14,3705.91 5067.76,3705.91 3250.12,3766.93 3458.78,3766.93 4920.12,3766.93 5128.78,3766.93 3250.12,3853.54 3458.78,3853.54 4920.12,3853.54 5128.78,3853.54 3311.14,3914.57 3397.76,3914.57 4981.14,3914.57 5067.76,3914.57

## Polygon pours and split planes (outlines as drawn)
GND on Top Layer "GND" (solid, remove dead copper, pour order 34): 3172,3999 5195,3995 5197,1878 3172,1878
NetD1_2 on Top Layer "NONET_L-01_P-001" (solid, remove dead copper, pour order 13): 3416,3300 ccw(c3414.5,3262.5) 3377,3264 3377,2649 ccw(c3477,2649) 3477,2549 3709,2549 ccw(c3709,2649) 3809,2649 3809,2685 ccw(c3709,2685) 3709,2785 3688,2785 ccw(c3685,2689) 3589,2692 cw(c3542,2689) 3545,2642 3519,2642 cw(c3519,2727.5) 3433.5,2727.5 3433.5,3207.5 cw(c3464.5,3211) 3461,3242 3550,3242 ccw(c3550,3273) 3581,3273 ccw(c3554,3273) 3554,3300
+5 on Top Layer "NONET_L-01_P-001" (solid, remove dead copper, pour order 29): 3908,2575 ccw(c4008,2575) 4008,2475 4469,2475 ccw(c4469,2517) 4511,2517 4511,2581 ccw(c4469,2581) 4469,2623 4304,2623 cw(c4304,2723) 4204,2723 4204,2779 cw(c4278,2779) 4278,2853 4402,2853 ccw(c4402,2878) 4427,2878 4427,2899 ccw(c4397,2899) 4397,2929 4008,2929 ccw(c4008,2829) 3908,2829
+3.3 on Top Layer "NONET_L-01_P-001" (solid, remove dead copper, pour order 30): 4313,2984 4313,2969 ccw(c4333,2969) 4333,2949 4475.58,2949 cw(c4475.58,2849.01) 4546.29,2919.71 4558,2908 ccw(c4594.21,2944.21) 4594.21,2893 4646,2893 ccw(c4646,2936) 4689,2936 4689,3229.67 ccw(c4648.93,3227.93) 4647.18,3268 4643,3268 ccw(c4643,3229) 4604,3229 4604,3130 cw(c4569,3130) 4569,3095 4518.42,3095 ccw(c4518.42,2995.01) 4447.71,3065.71 4422.29,3040.29 cw(c4351.58,3110.99) 4351.58,3011 4340,3011 ccw(c4340,2984)
NetC1_2 on Top Layer "NONET_L-01_P-001" (solid, remove dead copper, pour order 12): 3798,3367 cw(c3798,3316) 3849,3316 3849,3295 cw(c3801,3295) 3801,3247 3790,3247 cw(c3790,3292) 3745,3292 ccw(c3729,3292) 3729,3308 3482,3308 cw(c3482,3339) 3451,3339 cw(c3479,3339) 3479,3367
+12 on Top Layer "NONET_L-01_P-001" (solid, remove dead copper, pour order 10): 4164,3780 4164,3846 ccw(c4123,3846) 4123,3887 3904,3887 ccw(c3904,3835) 3852,3835 3852,3525 cw(c3802,3525) 3802,3475 3478,3475 ccw(c3478,3442) 3445,3442 3445,3400 ccw(c3472,3400) 3472,3373 4065,3373 ccw(c4065,3473) 4165,3473
NetF1_0 on Top Layer "NONET_L-01_P-001" (solid, remove dead copper, pour order 0): 4544,3842 ccw(c4501,3842) 4501,3885 4262,3885 ccw(c4262,3848) 4225,3848 4225,3722 ccw(c4270,3722) 4270,3677 4498,3677 ccw(c4498,3723) 4544,3723
GND on Bottom Layer "GND" (solid, remove dead copper, pour order 42): 3173,3997 3173,1879 5196,1879 5195,1880 5196,3997
+5 on Bottom Layer "+5" (solid, remove dead copper, pour order 35): 3731,2010 ccw(c3827,2010) 3827,1914 4220,1914 ccw(c4220,1999) 4305,1999 4305,2865 ccw(c4242,2865) 4242,2928 4102,2928 ccw(c4094,2881) 4047,2889 4047,2542 ccw(c4107.5,2536.5) 4102,2476 4169,2476 cw(c4169,2443) 4202,2443 4202,2289 cw(c4102,2289) 4102,2189 3831,2189 ccw(c3831,2089) 3731,2089
+12 on Bottom Layer "+12" (solid, remove dead copper, pour order 39): 5059,3114 5111,3114 ccw(c5111,3172) 5169,3172 5169,3355 ccw(c5105,3355) 5105,3419 4609,3419 cw(c4609,3529) 4499,3529 4494,3566 ccw(c4406,3566) 4406,3654 4250,3654 cw(c4250,3741) 4163,3741 4163,3842 ccw(c4117,3842) 4117,3888 3899,3888 ccw(c3899,3840) 3851,3840 3851,3458 ccw(c3897,3458) 3897,3412 4277.58,3412 cw(c4277.58,3312.01) 4348.29,3382.71 4367.71,3363.29 ccw(c4438.42,3434) 4438.42,3334 4764,3334 cw(c4764,3234) 4864,3234 4864,3194 ccw(c4944,3194) 4944,3114
+3.3 on Bottom Layer "+3.3" (solid, remove dead copper, pour order 41): 5128,2732 ccw(c5128,2778) 5174,2778 5174,3015 ccw(c5107,3015) 5107,3082 4780.42,3082 cw(c4780.42,3182) 4709.71,3111.29 4690.29,3130.71 ccw(c4619.58,3060) 4619.58,3160 4433,3160 ccw(c4433,3060) 4333,3060 4333,2008 ccw(c4398,2008) 4398,1943 ccw(c4398,2007) 4462,2007 4462,2453 cw(c4741,2453) 4741,2732

## Keep-outs
Keep-Out Layer:
  the board outline again, w5

## Other copper
Top Layer:
  pour cut-out: 3691,3076 ccw(c3699.12,3018.49) 3641.61,3010.37 3641.61,2776.41 cw(c3664.95,2753.07) 3664.96,2786.08 3718.85,2786.08 cw(c3718.85,2695.93) 3809,2695.93 3809,2639.15 cw(c3717.85,2639.15) 3717.85,2548 3638,2548 3638,2329 ccw(c3684,2329) 3684,2283 3986,2283 ccw(c3986,2334) 4037,2334 4037,2474 4007.47,2474 cw(c4007.47,2574) 3936.76,2503.29 3929.56,2510.49 cw(c3984.02,2564.95) 3907,2564.95 3907,2828 cw(c4007,2828) 3936.29,2898.71 3937.29,2899.71 cw(c4008,2829) 4008,2929 4037,2929 4037,3008 ccw(c3968,3008) 3968,3077
Bottom Layer:
  pour cut-out: 3757,3077 3721,3077 ccw(c3721,2995) 3639,2995 3639,2385 ccw(c3739,2385) 3739,2285 3939,2285 ccw(c3939,2384) 4038,2384 4038,2987 ccw(c3948,2987) 3948,3077

## Silkscreen, mask and mechanical layers (free items; w line width, h text height)
Top Overlay:
  lines w10: 4533,3351 4813,3351 4813,3604 4533,3604 4533,3351
Bottom Overlay:
  drawing of 42 lines, arcs and shapes, not listed

## Text inside footprints (layer, text, board x,y; h text height)
C3: Top Overlay "+" at 3914,3365 h48 r180
C9: Top Overlay "+" at 4269,2457 h48 r180
D2: Top Overlay "+" at 4861,3292 h30
D3: Top Overlay "+" at 4861,2990 h30
D4: Top Overlay "+" at 4863,3138 h30